# Allegro board PP001738.01.brd
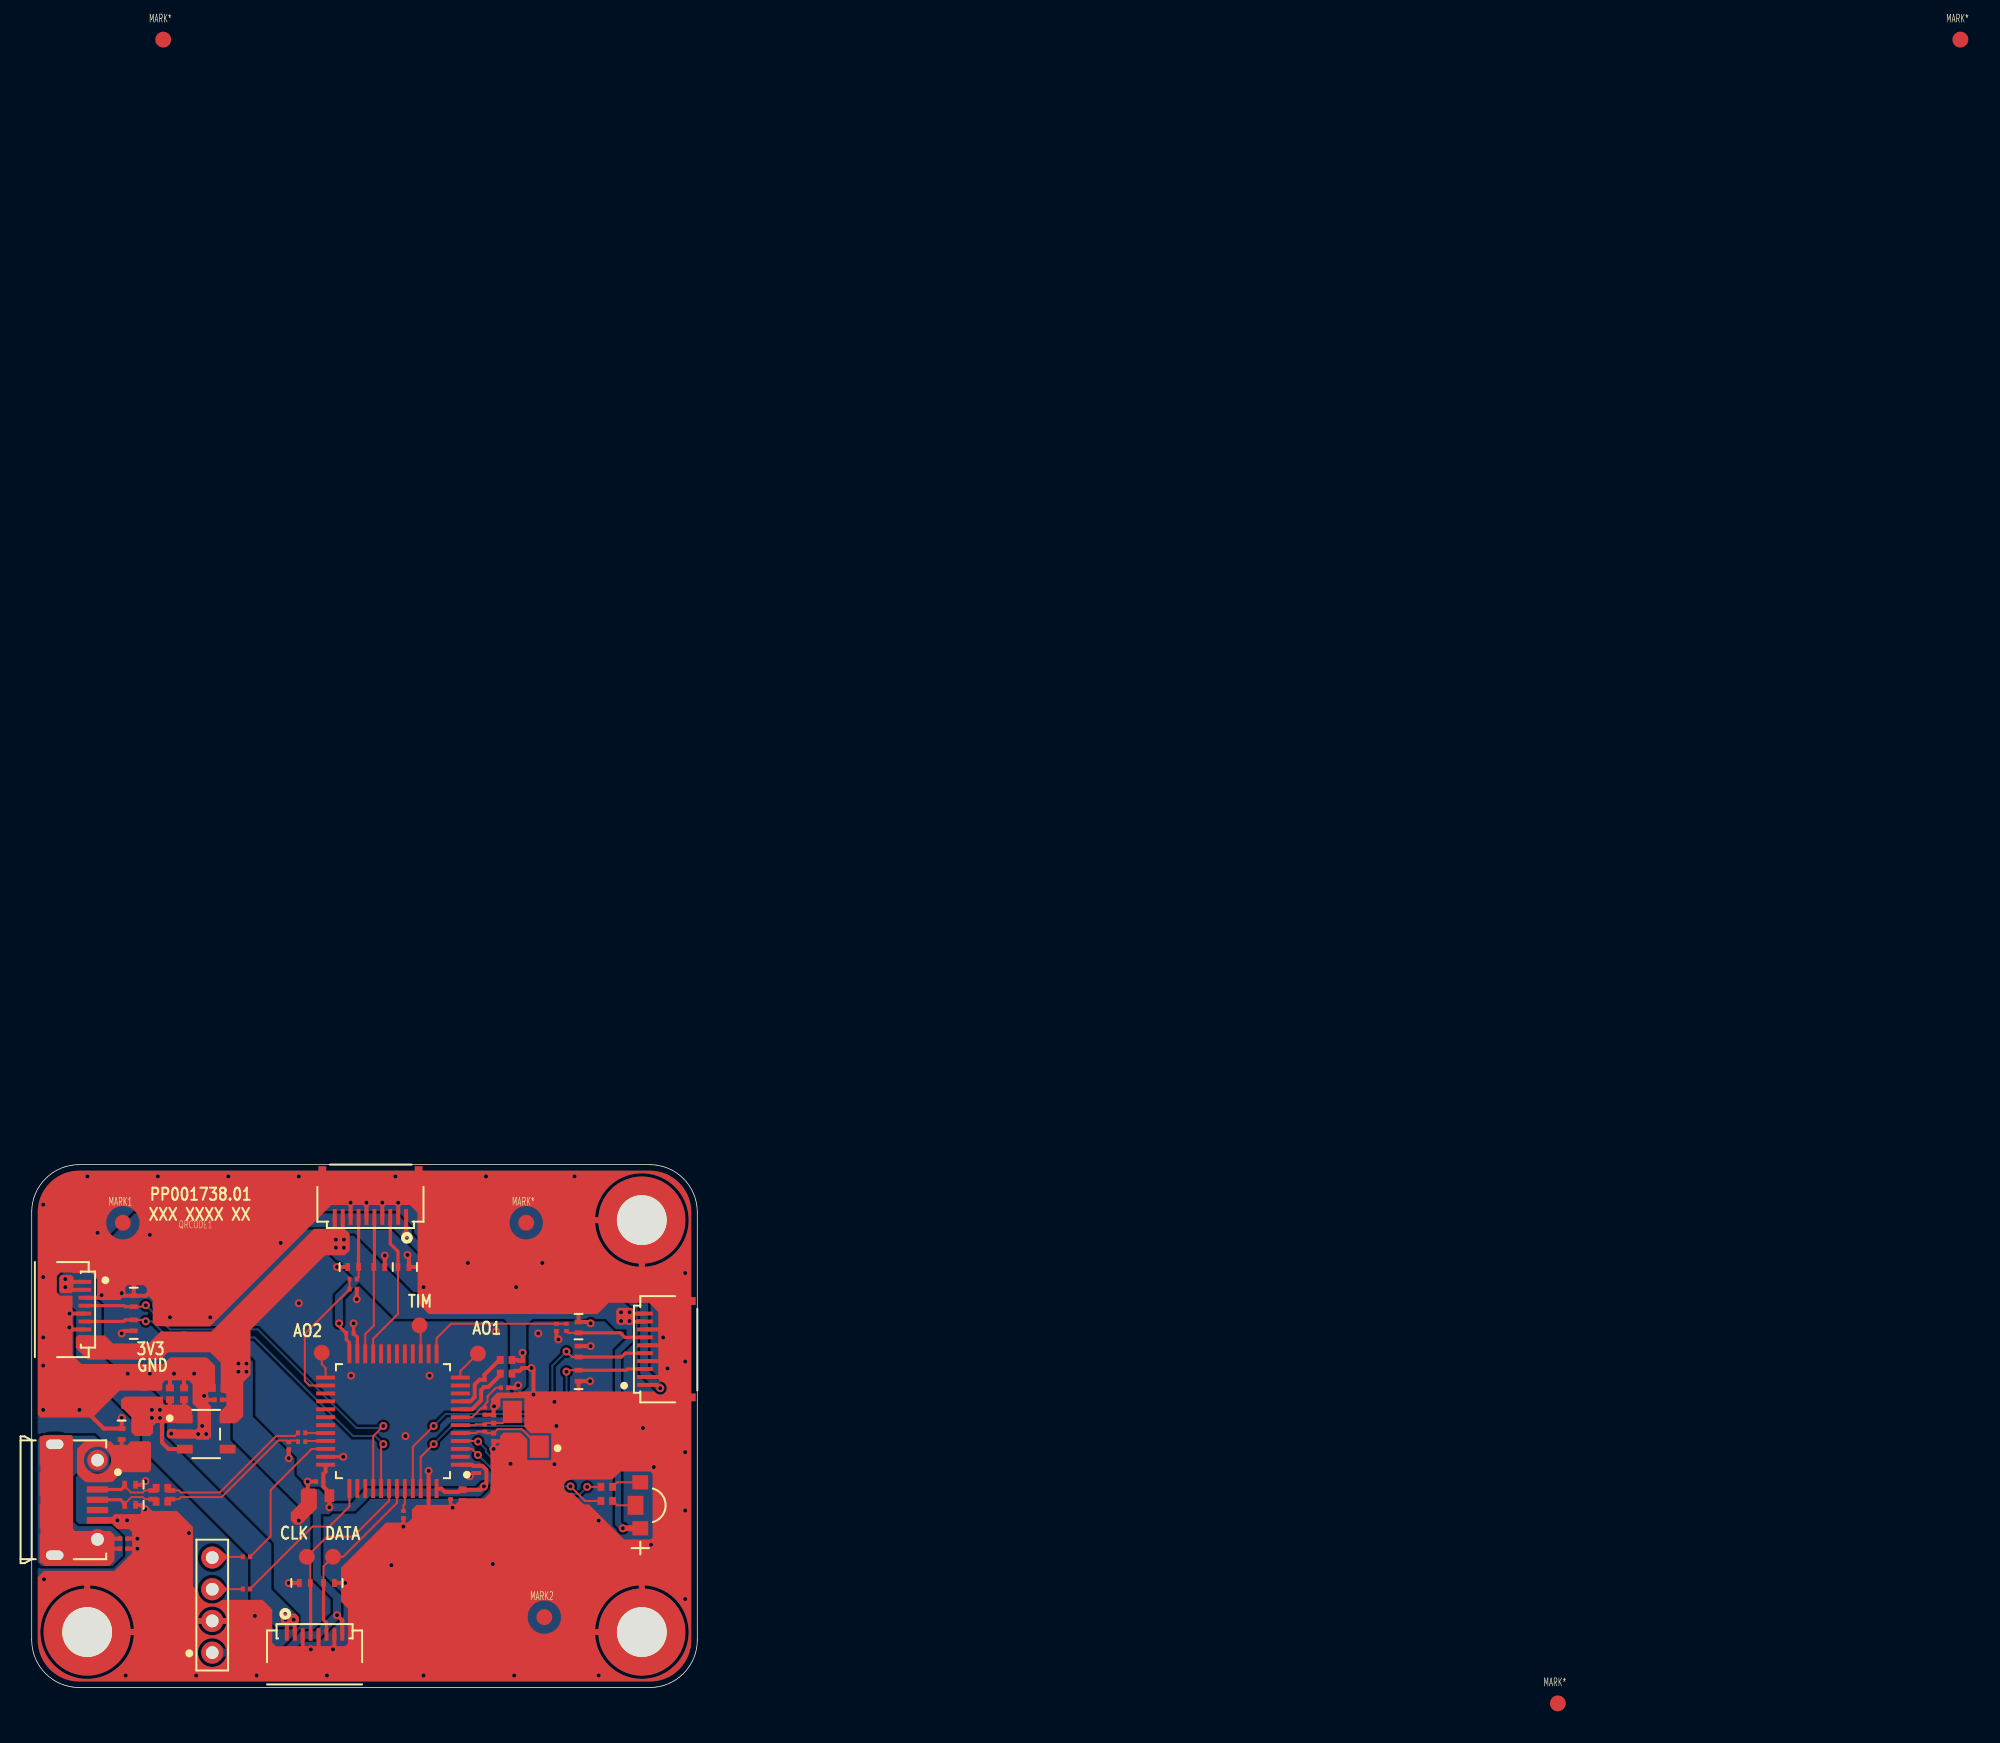
[diagram p0: board, top side]
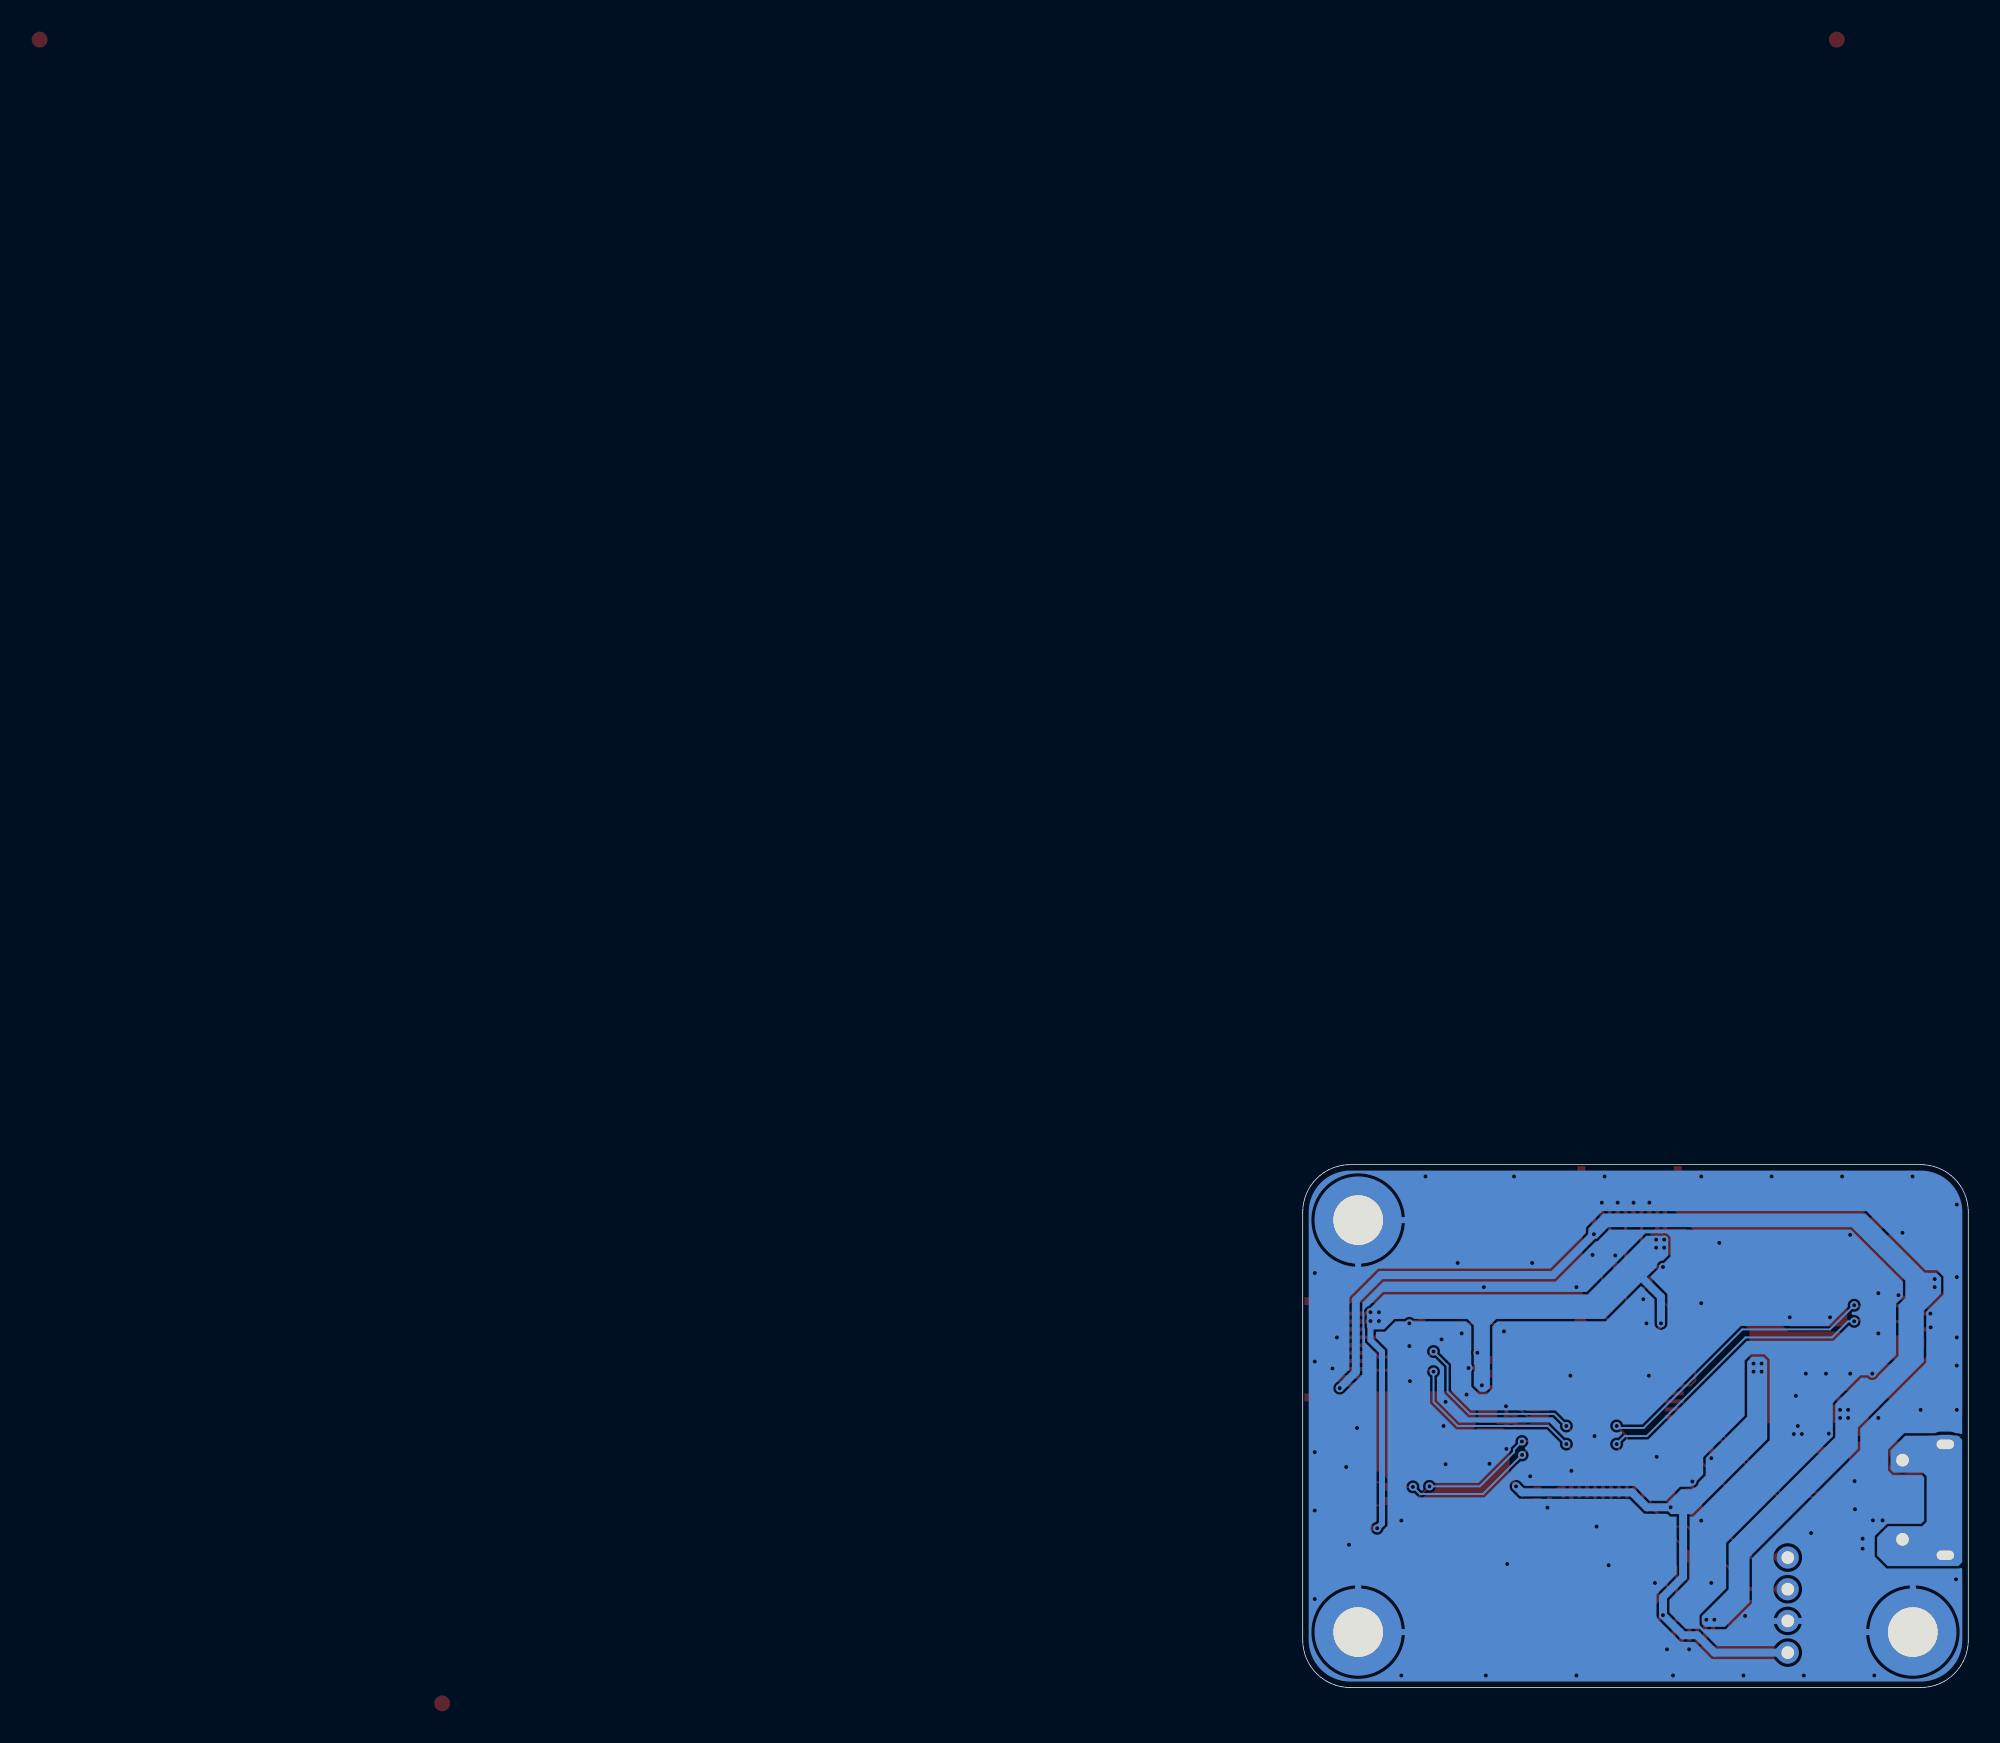
[diagram p1: board, bottom side, seen from below]

Outline 42 x 33 mm; copper layers: TOP, ART02, ART03, BOTTOM. Coordinates in mm from the lower left corner of the outline.
Outline path: 0,30 0,3 arc(0.88,0.88) 3,0 39,0 arc(41.12,0.88) 42,3 42,30 arc(41.12,32.12) 39,33 3,33 arc(0.88,32.12) 0,30

## Design rules (mm)
net group ADC_CHANNEL1: nets ADC_CHANNEL1 N16779618
net group ADC_CHANNEL2: nets ADC_CHANNEL2 N16782230
net group AGND: nets AGND VCCA_3V3
net group LED_GREEN: nets LED_GREEN N16762233
net group LED_RED: nets LED_RED N16762237
net group N16738443: nets N16738443 N16738447
net group SWCLK: nets N16761440 SWCLK
net group SWDIO: nets N16761444 SWDIO
net group PWR: nets GND VCC_3V3 VCC_5V
net group USB_DM: nets N16451924 N16739777 USB_DM
net group USB_DP: nets N16451878 N16739783 USB_DP

## Placement (name value [footprint] x y rotation side)
C1  18pF  [C0201]  29.15 15.79 90 top
C2  18pF  [C0201]  29.15 16.94 270 top
C3  100.0nF  [C0201_A]  18.17 13 0 top
C4  100.0nF  [C0201_A]  26.43 12.11 90 top
C5  100.0nF  [C0201_A]  28.21 13.76 90 top
C6  100.0nF  [C0201_A]  20.08 22.35 180 top
C7  100.0nF  [C0201_A]  28.59 17.45 90 top
C8  100.0nF  [C0201_A]  30.98 20.39 90 top
C9  100.0nF  [C0201_A]  28.56 19.2 90 top
C10  4.7uF  [C0603_B]  18.17 12.11 180 top
C11  1.0uF  [C0402_B]  27.19 12.11 270 top
C12  100nF  [C0402]  7.89 18.54 90 top
C13  1.0uF  [C0402_B]  9.61 18.54 90 top
C14  1.0nF  [C0201_A]  5.8 9.39 0 top
C15  2.2uF  [C0603_D]  6.06 18.54 90 top
C16  1.0uF  [C0402_B]  8.73 18.54 90 top
C17  100nF  [C0402]  7.07 18.54 90 top
C18  100.0nF  [C0201_A]  11.77 18.16 0 top
C19  1.0uF  [C0402_B]  11.77 18.92 180 top
C20  2.2uF  [C0603_D]  11.65 19.94 180 top
C21  33.0pF_NC  [C0201_A]  33.11 22.73 270 top
C22  33.0pF_NC  [C0201_A]  20.28 25.14 0 top
D1  BL-HGEUB34H-TRB  [LED_3-3X2-1P1_H]  38.4 11.5 270 top
D2  TPD1E10B06DP  [SOD882_2-0P65-1P02X0P62-0P5]  5.68 16 90 top
D3  PESD5V0F1BL  [SOD882_2-0P65-1P02X0P62-0P5]  6.21 12.8 0 top
D4  PESD5V0F1BL  [SOD882_2-0P65-1P02X0P62-0P5]  6.21 11.53 0 top
D5  PESD5V0F1BL  [SOD882_2-0P65-1P02X0P62-0P5]  18.76 6.6 0 top
D6  PESD5V0F1BL  [SOD882_2-0P65-1P02X0P62-0P5]  17.23 6.6 180 top
D7  PESD5V0F1BL  [SOD882_2-0P65-1P02X0P62-0P5]  6.44 22.86 270 top
D8  PESD5V0F1BL  [SOD882_2-0P65-1P02X0P62-0P5]  6.44 24.38 90 top
D9  PESD5V0F1BL  [SOD882_2-0P65-1P02X0P62-0P5]  34.51 22.73 90 top
D10  PESD5V0F1BL  [SOD882_2-0P65-1P02X0P62-0P5]  34.51 21.21 90 top
D11  PESD5V0F1BL  [SOD882_2-0P65-1P02X0P62-0P5]  34.51 19.68 270 top
D12  PESD5V0F1BL  [SOD882_2-0P65-1P02X0P62-0P5]  20.28 26.54 180 top
D13  PESD5V0F1BL  [SOD882_2-0P65-1P02X0P62-0P5]  21.93 26.54 0 top
D14  PESD5V0F1BL  [SOD882_2-0P65-1P02X0P62-0P5]  23.46 26.54 0 top
FB1  BLM15BB121SN1  [L0402_B]  29.93 20.67 180 top
FB2  BLM15BB121SN1  [L0402_B]  29.93 19.81 180 top
HOLE1  Hole  [HOLE_PC5P5DC3P1]  38.5 29.5 0 top
HOLE2  Hole  [HOLE_PC5P5DC3P1]  38.5 3.5 0 top
HOLE3  Hole  [HOLE_PC5P5DC3P1]  3.5 3.5 0 top
J1  SIP4-2P54MM  [DCON_4-2-8X2-6_M]  11.39 5.2 90 top
J2  105017-0001  [USB_5-0P65-7P5X4P7-2P9]  2.35 11.85 270 top
J3  OK-F501-08325  [OK-F501_8-0P5-6X3P8-1P85]  17.85 1.9 0 top
J4  OK-F501-08325  [OK-F501_8-0P5-6X3P8-1P85]  1.9 23.85 270 top
J5  503480-1000  [CON_10-0P5-6P7X3P6-1]  40.2 21.35 90 top
J6  503480-1000  [CON_10-0P5-6P7X3P6-1]  21.37 31.2 180 top
L1  INDUCTOR  [L0603]  7.07 15.62 90 top
L2  EXC24CE900U_NC  [DL0504]  8.22 12.16 0 top
MARK1  T POINT R  [MARK_C1]  5.75 29.33 0 top
MARK2  T POINT R  [MARK_C1]  32.35 4.44 0 top
MARK*  -  [unnamed#2]  121.7 104 0 top
MARK*#2  -  [unnamed#2]  31.2 29.33 0 top
MARK*#3  -  [unnamed#2]  8.3 104 0 top
MARK*#4  -  [unnamed#2]  96.3 -1 0 top
NOREF  -  []  38.24 19.55 90 top
NOREF#2  -  []  23.12 29.7 0 top
NOREF#3  -  []  18.55 14.06 90 top
NOREF#4  -  []  23.62 29.7 0 top
NOREF#5  -  []  17.9 19.81 0 top
NOREF#6  -  []  10.39 9.33 0 top
NOREF#7  -  []  10.39 1.08 90 top
NOREF#8  -  []  7.07 14.92 90 top
NOREF#9  -  []  18.02 32.45 0 top
NOREF#10  -  []  38.7 19.1 0 top
NOREF#11  -  []  41.35 18.31 90 top
NOREF#12  -  []  11.39 2.2 90 top
NOREF#13  -  []  36.85 22.6 0 top
NOREF#14  -  []  19.41 29.4 90 top
NOREF#15  -  []  38.7 19.1 90 top
NOREF#16  -  []  19.2 13.21 90 top
NOREF#17  -  []  18.33 32.35 0 top
QRCODE1  T POINT R  [QRCODE_3P5X3P5]  10.5 26.16 0 top
R1  100R  [R0201]  13.55 6.22 0 top
R2  100R  [R0201]  13.55 8.25 0 top
R3  22.0R  [R0201]  17.03 16.07 0 top
R4  22.0R  [R0201]  17.03 15.52 0 top
R5  1.5KR  [R0201]  16.22 15.26 90 top
R6  510R  [R0402]  36.28 12.66 180 top
R7  510R  [R0402]  36.28 11.78 180 top
R8  1M  [R0201]  28.59 16.38 270 top
R9  10.0KR  [R0201]  29.83 18.92 0 top
R10  10.0KR  [R0201]  23.46 10.92 270 top
R11  0.0R  [R0402]  8.22 12.59 0 top
R12  0.0R  [R0402]  8.22 11.73 0 top
R13  1M  [R0201]  5.8 8.76 180 top
R14  100R  [R0201]  33.74 22.73 90 top
R15  100R  [R0201]  20.28 25.78 180 top
TP_3V3_1  T POINT R  [TP_C1]  9.61 21.97 0 top
TP_ADCOUT1  T POINT R  [TP_C1]  28.16 21.08 180 top
TP_ADCOUT2  T POINT R  [TP_C1]  18.3 21.13 180 top
TP_CLK1  T POINT R  [TP_C1]  17.36 8.25 0 top
TP_DATA1  T POINT R  [TP_C1]  19.01 8.25 0 top
TP_GND1  T POINT R  [TP_C1]  9.61 20.32 0 top
TP_TIM1  T POINT R  [TP_C1]  24.47 22.86 0 top
U1  STM32F303CBT6  [QFP_48-0P5-7P2X7P2-1P6]  22.8 16.81 90 top
U2  LP5907MFX-3.3/NOPB  [SOT-23_5-0P95-3P05X1P75-1P45]  11.01 16 0 top
X1  12.0MHz  [X322508]  31.18 16.3 90 top

## Library data of the parts
C1 C2 = CAP NP: signal model: DEFAULT_CAPACITOR_18.000000pF_2_1
C3-C9 C18 = C: signal model: DEFAULT_CAPACITOR_100000pF_2_1
C10 = CAP NP: signal model: DEFAULT_CAPACITOR_4.7e+06pF_2_1
C11 C13 C16 C19 = CAP NP: signal model: DEFAULT_CAPACITOR_1e+06pF_2_1
C12 C17 = CAP NP: signal model: DEFAULT_CAPACITOR_100000pF_2_1
C14 = C: signal model: DEFAULT_CAPACITOR_1000pF_2_1
C15 C20 = CAP NP: signal model: DEFAULT_CAPACITOR_2.2e+06pF_2_1
C21 C22 = C
D1 = LED-3PIN-A
D2 = TPD1E10B06DP
D3-D14 = PESD5V0F1BL
FB1 FB2 = FERRITE_BEAD
HOLE1-HOLE3 = Hole
J1 = SIP4-2P54MM
J2 = 105017-0001
J3 J4 = 1X8-CON-2
J5 J6 = 503480-1000
L1 = INDUCTOR
L2 = DLP11SA900HL2
MARK1 MARK2 QRCODE1 TP_3V3_1 TP_ADCOUT1 TP_ADCOUT2 TP_CLK1 TP_DATA1 TP_GND1 TP_TIM1 = T POINT R
R1 R2 R14 R15 = RES: signal model: DEFAULT_RESISTOR_100.000000OHM_2_1
R3 R4 = R: signal model: DEFAULT_RESISTOR_22.000000OHM_2_1
R5 R9 R10 = R
R6 R7 = RES: signal model: DEFAULT_RESISTOR_510.000000OHM_2_1
R8 R11-R13 = RES: signal model: DEFAULT_RESISTOR_0.001OHM_2_1
U1 = STM32F303CBT6
U2 = LP5907MFX-3_1.3/NOPB
X1 = OSC-4PIN

## Footprints (pads in the part's own frame, mm; a bottom-side part is the same pattern mirrored in y, then rotated)
C0201
  rect 0.305x0.33 smd: 1(-0.254,0) 2(0.254,0)
C0201_A
  rect 0.254x0.305 smd: 1(-0.229,0) 2(0.229,0)
C0402
  rect 0.5x0.5 smd: 1(-0.45,0) 2(0.45,0)
C0402_B
  rect 0.432x0.508 smd: 1(-0.369,0) 2(0.369,0)
C0603_B
  rect 0.61x0.813 smd: 1(-0.61,0) 2(0.61,0)
C0603_D
  rect 0.635x0.813 smd: 1(-0.623,0) 2(0.623,0)
CON_10-0P5-6P7X3P6-1
  rect 0.25x1 smd: 1(-2.25,1.5) 2(-1.75,1.5) 3(-1.25,1.5) 4(-0.75,1.5) 5(-0.25,1.5) 6(0.25,1.5) 7(0.75,1.5) 8(1.25,1.5) 9(1.75,1.5) 10(2.25,1.5)
  rect 0.5x1.1 smd: 11(-3.04,-1.15) 12(3.04,-1.15)
DCON_4-2-8X2-6_M
  round 1.4 hole 0.8: 1(-3,0) 2(-1,0) 3(1,0) 4(3,0)
DL0504
  rect 0.6x0.3 smd: 1(-0.55,-0.275) 2(0.55,-0.275) 3(0.55,0.275) 4(-0.55,0.275)
HOLE_PC5P5DC3P1
  round 5.5 hole 3.1: 1(0,0)
L0402_B
  rect 0.432x0.508 smd: 1(-0.369,0) 2(0.369,0)
L0603
  rect 0.8x0.8 smd: 1(-0.7,0) 2(0.7,0)
LED_3-3X2-1P1_H
  rect 0.9x1 smd: A1(1.45,0) C2(-1.45,0)
  rect 1.2x1 smd: C1(0,-0.3)
MARK_C1
  round 1 smd: 1(0,0)
OK-F501_8-0P5-6X3P8-1P85
  rect 0.25x0.8 smd: 1(-1.75,1.45) 2(-1.25,1.45) 3(-0.75,1.45) 4(-0.25,1.45) 5(0.25,1.45) 6(0.75,1.45) 7(1.25,1.45) 8(1.75,1.45)
  rect 0.4x0.8 smd: 9(-2.75,-1.05) 10(2.75,-1.05)
QFP_48-0P5-7P2X7P2-1P6
  rect 0.25x1.2 smd: 1(-2.75,-4.25) 2(-2.25,-4.25) 3(-1.75,-4.25) 4(-1.25,-4.25) 5(-0.75,-4.25) 6(-0.25,-4.25) 7(0.25,-4.25) 8(0.75,-4.25) 9(1.25,-4.25) 10(1.75,-4.25) 11(2.25,-4.25) 12(2.75,-4.25) 25(2.75,4.25) 26(2.25,4.25) 27(1.75,4.25) 28(1.25,4.25) 29(0.75,4.25) 30(0.25,4.25) 31(-0.25,4.25) 32(-0.75,4.25) 33(-1.25,4.25) 34(-1.75,4.25) 35(-2.25,4.25) 36(-2.75,4.25)
  rect 1.2x0.25 smd: 13(4.25,-2.75) 14(4.25,-2.25) 15(4.25,-1.75) 16(4.25,-1.25) 17(4.25,-0.75) 18(4.25,-0.25) 19(4.25,0.25) 20(4.25,0.75) 21(4.25,1.25) 22(4.25,1.75) 23(4.25,2.25) 24(4.25,2.75) 37(-4.25,2.75) 38(-4.25,2.25) 39(-4.25,1.75) 40(-4.25,1.25) 41(-4.25,0.75) 42(-4.25,0.25) 43(-4.25,-0.25) 44(-4.25,-0.75) 45(-4.25,-1.25) 46(-4.25,-1.75) 47(-4.25,-2.25) 48(-4.25,-2.75)
QRCODE_3P5X3P5
  round 0.076 smd: 1(0,0)
R0201
  rect 0.254x0.305 smd: 1(-0.229,0) 2(0.229,0)
R0402
  rect 0.432x0.508 smd: 1(-0.369,0) 2(0.369,0)
SOD882_2-0P65-1P02X0P62-0P5
  rect 0.3x0.5 smd: A(-0.345,0) C(0.345,0)
SOT-23_5-0P95-3P05X1P75-1P45
  rect 1x0.55 smd: 1(-1.35,0.95) 2(-1.35,0) 3(-1.35,-0.95) 4(1.35,-0.95) 5(1.35,0.95)
TP_C1
  round 1 smd: 1(0,0)
unnamed#2
  round 1 smd: 1(0,0)
USB_5-0P65-7P5X4P7-2P9
  rect 0.4x1.35 smd: 1(-1.3,1.8) 2(-0.65,1.8) 3(0,1.8) 4(0.65,1.8) 5(1.3,1.8)
  round 1.3 hole 0.8: 6(-2.5,1.8) 7(2.5,1.8)
  rect 1.8x1.9 hole 0.6x1.1: 8(3.5,-0.9) 11(-3.5,-0.9)
  rect 1.5x1.9 smd: 9(1,-0.9) 10(-1,-0.9)
X322508
  rect 1.4x1.2 smd: 1(-1.1,-0.85) 2(1.1,-0.85) 3(1.1,0.85) 4(-1.1,0.85)

## Nets
AGND: C9.1 FB2.2 U1.8(VSSA/VREF-)
GND: C1.1 C2.1 C3.1 C4.1 C5.1 C6.1 C7.1 C8.1 C10.2 C11.2 C12.2 C13.2 C14.2 C15.2 C16.2 C17.2 C18.1 C19.2 C20.2 C21.2 C22.2 D2.C(2) D3.C D4.C D5.C D6.C D7.C D8.C D9.C D10.C D11.C D12.C D13.C D14.C FB2.1 HOLE1.1 HOLE2.1 HOLE3.1 J1.2 J2.5(GND) J3.3 J3.5 J3.7 J3.9 J3.10 J4.3 J4.5 J4.7 J4.9 J4.10 J5.2 J5.4 J5.6 J5.8 J5.11 J5.12 J6.2 J6.4 J6.6 J6.8 J6.11 J6.12 QRCODE1.1(TP) R10.2 R13.1 TP_GND1.1(TP) U1.23(VSS_2) U1.35(VSS_3) U1.47(VSS_1) U2.2(GND) X1.2 X1.4
VCC_3V3: C3.2 C4.2 C5.2 C6.2 C8.2 C10.1 C11.1 C18.2 C19.1 C20.1 D1.A1(ANODE) FB1.1 J1.1 J3.8 J4.8 J5.9 J5.10 J6.9 J6.10 R5.1 R9.2 TP_3V3_1.1(TP) U1.1(VBAT) U1.24(VDD_2) U1.36(VDD_3) U1.48(VDD_1) U2.5(OUT)
VCC_5V: C12.1 C13.1 C15.1 C16.1 C17.1 J3.1 J3.2 J4.1 J4.2 J5.1 J6.1 L1.2 U2.1(IN) U2.3(EN)
VCCA_3V3: C9.2 FB1.2 U1.9(VDDA/VREF+)
ADC_CHANNEL1: C21.1 R14.2 U1.13(PA3)
ADC_CHANNEL2: C22.1 R15.2 U1.26(PB13)
LED_GREEN: R6.2 U1.3(PC14-OSC32_IN)
LED_RED: R7.2 U1.4(PC15-OSC32_OUT)
RX1_CLK: D10.A J5.5 U1.45(PB8)
RX1_DATA: D11.A J5.3 U1.46(PB9)
RX2_CLK: D13.A J6.5 U1.22(PB11)
RX2_DATA: D14.A J6.3 U1.21(PB10)
SWCLK: R1.2 U1.37(PA14)
SWDIO: R2.2 U1.34(PA13)
TX1_CLK: D6.A J3.4 TP_CLK1.1(TP) U1.42(PB6)
TX1_DATA: D5.A J3.6 TP_DATA1.1(TP) U1.43(PB7)
TX2_CLK: D8.A J4.4 U1.40(PB4)
TX2_DATA: D7.A J4.6 U1.41(PB5)
USB_DM: L2.3 R3.1 R11.2
USB_DP: L2.2 R4.1 R5.2 R12.2
N16451878: D4.A J2.3(DP) L2.1 R12.1
N16451924: D3.A J2.2(DM) L2.4 R11.1
N16452106: D2.A(1) J2.1(VBUS) L1.1
N16452110: C14.1 J2.6(SHELL1) J2.7(SHELL2) J2.8(SHELL3) J2.9(SHELL4) J2.10(SHELL5) J2.11(SHELL6) R13.2
N16738443: C2.2 R8.1 U1.6(PF1-OSC_OUT) X1.3
N16738447: C1.2 R8.2 U1.5(PF0-OSC_IN) X1.1
N16739461: C7.2 R9.1 U1.7(NRST)
N16739517: R10.1 U1.44(BOOT0)
N16739777: R3.2 U1.32(PA11)
N16739783: R4.2 U1.33(PA12)
N16761440: J1.3 R1.1
N16761444: J1.4 R2.1
N16762233: D1.C2(CATHODE2) R6.1
N16762237: D1.C1(CATHODE1) R7.1
N16779618: D9.A J5.7 R14.1
N16782230: D12.A J6.7 R15.1
N16787058: TP_ADCOUT2.1(TP) U1.25(PB12)
N16787082: TP_ADCOUT1.1(TP) U1.12(PA2)
N16795879: TP_TIM1.1(TP) U1.15(PA5)

Pads without a net: J2 4; MARK1 1; MARK2 1; MARK* 1; MARK*#2 1; MARK*#3 1; MARK*#4 1; U1 2 10 11 14 16 17 18 19 20 27 28 29 30 31 38 39; U2 4

## Via types
v1: diameter 0.508, hole 0.254, TOP to BOTTOM, 146 vias

## Routing (per net, layer and track width the routed paths; a pad name or vN(x,y) marks a point on that pad's centre or on a via; arc(x,y) is an arc through that point)
AGND: length 3.9
  TOP w0.254: U1.8 27.79,17.56 28.36,18.13 28.36,18.77 C9.1 28.82,18.97 29.57,19.72 FB2.2
GND: length 151.7
  TOP w0.203: U1.35 v1(19.66,14.56) ; v1(26.56,11.35) 26.43,11.48 C4.1 ; v1(20.31,22.98) C6.1 20.55,22.11 U1.23
  TOP w0.254: J3.5 18.1,2.31 ; C14.2 v1(6.67,9.39) ; R13.1 v1(6.67,8.76) ; D12.C v1(19.27,26.54) ; 39.82,22.6 39.81,22.6 J5.8 ; FB2.1 30.48,19.99 30.8,19.99 C8.1 v1(31.53,20.16) 31.66,20.04 v1(31.66,18.49) ; X1.4 29.99,15.54 C1.1 v1(29.15,15.06) ; v1(35.27,22.98) 35.18,23.07 D9.C 34.51,23.9 34.46,23.95 ; J5.2 39.81,19.6 39.82,19.6 ; v1(33.24,21.97) 33.11,22.09 C21.2 ; 39.92,21.56 39.88,21.6 J5.6 ; J4.3 4.25,24.6 v1(4.41,24.76) ; v1(7.15,11.25) 6.87,11.53 D4.C ; 25.03,11.17 25.05,11.19 U1.47 v1(25.05,13.68) ; D7.C 5.84,22.51 v1(5.68,22.35) ; C10.2 17.41,12.26 v1(17.41,13) C3.1 ; v1(23.71,27.3) 23.8,27.21 D14.C 25.06,26.54 25.08,26.56 ; C13.2 9.61,19.58 ; J3.7 19.1,2.5 v1(19.01,2.41) ; J4.5 v1(2.39,23.6) ; v1(5.68,17.01) D2.C 4.55,16.34 3.59,17.29 ; v1(7.18,13.03) 6.95,12.8 D3.C ; v1(35.23,19.34) D11.C 34.51,18.26 ; C7.1 29.12,17.22 C2.1 29.15,17.73 v1(29.17,17.75) ; J4.7 2.5,22.6 v1(2.38,22.73) ; D8.C 5.84,24.73 v1(5.68,24.89) ; D8.C 7.22,24.73 7.43,24.94 ; D8.C 6.44,25.73 6.41,25.75 ; C22.2 v1(20.51,24.51) ; C18.1 11.14,18.16 v1(10.88,18.41) ; 39.81,20.6 J5.4 ; R10.2 v1(23.46,10.16) ; 17.08,2.28 17.1,2.3 J3.3 ; J6.8 v1(20.12,30.6) ; v1(19.77,6.6) D5.C ; J6.6 v1(21.12,30.6) ; v1(27.65,13.33) 27.85,13.53 C5.1 ; J6.2 v1(23.12,30.6) ; D13.C v1(22.28,27.27) ; D10.C v1(35.27,21.55) ; C16.2 8.73,19.55 v1(8.98,19.81) ; v1(16.22,6.6) D6.C ; J6.4 v1(22.12,30.6)
  TOP w0.381: 35.5,3.5 HOLE2.1 38.5,6.5 ; 35.5,29.5 HOLE1.1 38.5,26.5 ; 6.5,3.5 HOLE3.1 3.5,6.5 ; 10.44,4.2 J1.2 12.35,4.2
  ART02 w0.381: 3.5,1.25 HOLE3.1 ; HOLE3.1 3.5,5.75 ; HOLE3.1 1.25,3.5 ; HOLE3.1 5.75,3.5 ; HOLE1.1 40.75,29.5 ; HOLE1.1 38.5,27.25 ; HOLE1.1 38.5,31.75 ; HOLE1.1 36.25,29.5 ; J1.2 12.15,4.2 ; J1.2 11.39,4.96 ; J1.2 10.64,4.2 ; J1.2 11.39,3.45 ; HOLE2.1 40.75,3.5 ; HOLE2.1 38.5,1.25 ; HOLE2.1 38.5,5.75 ; HOLE2.1 36.25,3.5
  ART03 w0.381: HOLE1.1 38.5,31.75 ; HOLE1.1 40.75,29.5 ; HOLE1.1 38.5,27.25 ; HOLE1.1 36.25,29.5 ; HOLE3.1 3.5,5.75 ; HOLE3.1 3.5,1.25 ; HOLE3.1 1.25,3.5 ; HOLE3.1 5.75,3.5 ; HOLE2.1 40.75,3.5 ; HOLE2.1 38.5,5.75 ; HOLE2.1 36.25,3.5 ; HOLE2.1 38.5,1.25 ; 10.64,4.2 J1.2 ; J1.2 12.15,4.2 ; J1.2 11.39,4.96 ; J1.2 11.39,3.45
  BOTTOM w0.381: 38.5,26.5 HOLE1.1 35.5,29.5 ; 35.5,3.5 HOLE2.1 38.5,6.5 ; 12.35,4.2 J1.2 10.44,4.2 ; 3.5,6.5 HOLE3.1 6.5,3.5
  vias: v1(0.72,30.48) v1(0.72,25.9) v1(0.72,22.09) v1(0.72,20.32) v1(0.72,17.52) v1(0.78,6.83) v1(3.01,17.52) v1(3.52,32.25) v1(4.15,28.7) v1(5.41,10.55) v1(6.02,10.55) v1(5.93,0.76) v1(6.06,19.81) v1(7.46,28.57) v1(7.46,19.81) v1(7.96,32.25) v1(8.73,23.36) v1(8.8,16.02) v1(9.92,9.75) v1(10.25,19.81) v1(10.38,0.76) v1(10.5,16) v1(10.76,16.51) v1(11.01,16) v1(11.27,23.36) v1(12.41,32.25) v1(14.09,4.52) v1(14.19,0.76) v1(15.71,28.06) v1(16.85,32.25) v1(16.85,24.25) v1(16.85,10.54) v1(17.62,2.41) v1(18.63,0.76) v1(20.16,19.68) v1(22.7,7.72) v1(22.95,32.25) v1(23.58,15.87) v1(24.73,25.27) v1(24.73,0.76) v1(25.11,19.68) v1(27.52,26.79) v1(28.66,32.25) v1(29.1,7.79) v1(29.3,22.48) v1(30.21,14.12) v1(30.44,0.76) v1(30.57,25.27) v1(31.97,22.35) v1(32.22,26.79) v1(32.98,18.03) v1(32.98,14.09) v1(33.11,16.51) v1(34.25,32.25) v1(35.78,10.54) v1(35.78,0.76) v1(38.57,16.38) v1(39.08,9.01) v1(39.26,13.92) v1(39.84,22.09) v1(40.12,20.14) v1(41.24,26.16) v1(41.24,20.57) v1(41.24,14.86) v1(41.24,11.17) v1(41.24,5.58)
VCC_3V3: length 63.9
  TOP w0.203: v1(19.39,22.98) 19.39,22.81 C6.2 19.85,21.97 20.05,21.77 U1.24
  TOP w0.254: v1(37.72,23.69) 37.81,23.6 J5.10 ; C18.2 12.43,18.16 ; 19.62,28.75 J6.9 ; v1(30.7,19.07) 30.54,18.92 R9.2 ; U1.48 25.85,12.56 26.07,12.34 C4.2 26.91,12.34 27.05,12.48 C11.1 28.32,12.48 v1(28.54,12.7) 28.69,12.85 28.69,13.74 28.44,13.99 C5.2 27.85,13.99 27.78,14.06 U1.1 ; J3.8 19.6,4.23 v1(19.27,4.57) ; U1.36 18.55,13.63 18.4,13.48 C3.2 18.4,12.7 18.78,12.31 C10.1 v1(18.78,11.37) ; v1(37.72,23.13) 37.75,23.1 J5.9 ; FB1.1 30.67,20.67 30.72,20.62 C8.2 v1(30.98,21.13) ; J6.10 19.12,28.73 ; v1(16.22,14.47) R5.1
  TOP w0.381: D1.A1 v1(37.3,10.05)
  BOTTOM w0.381: v1(37.3,10.05) 37,10.35 37,21.2 37.72,21.93 v1(37.72,23.13)
  BOTTOM w0.508: 20.66,25.93 19.39,24.66 v1(19.39,22.98) ; v1(18.78,11.37) 20.28,11.37 21.22,12.32 28.16,12.32 v1(28.54,12.7) ; J1.1 16.01,2.2 17.11,3.3 18,3.3 v1(19.27,4.57) 19.27,5.71 18,6.98 18,11.3
  vias: v1(13.04,20.44) v1(13.04,19.94) v1(13.55,20.44) v1(13.55,19.94) v1(19.19,28.27) v1(19.19,27.76) v1(19.7,28.27) v1(19.7,27.76) v1(37.19,23.69) v1(37.19,23.13)
VCC_5V: length 32.7
  TOP w0.254: v1(8.09,17.01) 8.22,16.89 8.22,15.46 8.63,15.05 U2.3 ; J4.1 2.45,25.6 ; J3.2 16.6,4.25 ; J3.1 16.1,4.28 ; J4.2 2.42,25.1 ; J5.1 39.46,19.1 v1(39.66,18.89) ; J6.1 v1(23.62,28.61) ; C13.1 9.61,17.65 ; C16.1 8.73,17.78
  BOTTOM w0.508: v1(39.66,18.89) 38.65,19.91 38.65,24.46 37.07,26.03 26.2,26.03 v1(23.62,28.61)
  vias: v1(2.12,25.78) v1(2.12,25.27) v1(7.58,17.52) v1(7.58,17.01) v1(8.09,17.52) v1(16.02,4.28) v1(16.53,4.28)
VCCA_3V3: length 4.2
  TOP w0.254: U1.9 27.68,18.06 27.95,18.33 27.95,19.12 28.26,19.43 C9.2 28.56,19.73 29.5,20.67 FB1.2
ADC_CHANNEL1: length 9.6
  TOP w0.127: R14.2 C21.1 26.46,22.96 25.55,22.04 U1.13
ADC_CHANNEL2: length 9
  TOP w0.127: U1.26 17.52,19.06 17.23,19.35 17.23,22.32 C22.1 R15.2
LED_GREEN: length 10.2
  TOP w0.127: v1(28.16,14.68) 27.77,15.06 U1.3 ; R6.2 v1(35.05,12.66)
  BOTTOM w0.127: v1(35.05,12.66) 34.6,12.21 30.62,12.21 v1(28.16,14.68)
LED_RED: length 10.5
  TOP w0.127: R7.2 34.92,11.78 v1(34,12.7) ; U1.4 28.13,15.56 v1(28.17,15.53)
  BOTTOM w0.127: v1(28.17,15.53) 28.66,15.03 28.66,14.86 30.82,12.7 v1(34,12.7)
RX1_CLK: length 21
  TOP w0.127: v1(33.74,21.21) 34.09,20.86 D10.A ; U1.45 24.05,15.19 v1(25.36,16.51)
  TOP w0.203: J5.5 37.45,21.1 37.21,20.86 D10.A
  BOTTOM w0.127: v1(25.36,16.51) 26.12,17.27 31.46,17.27 32.86,18.67 32.86,20.32 v1(33.74,21.21)
RX1_DATA: length 19.6
  TOP w0.127: v1(33.74,19.94) 33.84,20.03 D11.A ; v1(25.36,15.36) 24.55,14.55 U1.46
  TOP w0.203: J5.3 37.59,20.1 37.52,20.03 D11.A
  BOTTOM w0.127: v1(25.36,15.36) 26.51,16.51 32.22,16.51 33.74,18.03 v1(33.74,19.94)
RX2_CLK: length 8.9
  TOP w0.127: U1.22 21.05,22.3 21.59,22.84 D13.A
  TOP w0.203: D13.A 21.62,26.58 J6.5
RX2_DATA: length 9.5
  TOP w0.127: D14.A 23.11,23.58 21.55,22.01 U1.21
  TOP w0.203: D14.A 23.11,27.52 22.62,28.01 J6.3
SWCLK: length 9.6
  TOP w0.127: R1.2 17.72,10.16 18.78,10.16 20.05,11.43 U1.37
SWDIO: length 9.3
  TOP w0.127: R2.2 15.08,9.55 15.08,12.47 17.67,15.06 U1.34
TX1_CLK: length 12.4
  TOP w0.127: D6.A 17.58,8.03 TP_CLK1.1 18.63,9.52 20.28,9.52 22.55,11.79 U1.42
  TOP w0.203: J3.4 17.6,6.58 D6.A
TX1_DATA: length 11.6
  TOP w0.127: U1.43 23.05,11.65 19.65,8.25 TP_DATA1.1 18.41,7.65 D5.A
  TOP w0.203: D5.A 18.41,4.28 18.6,4.09 J3.6
TX2_CLK: length 26.4
  TOP w0.127: D8.A 7.11,24.04 v1(7.2,24.13) ; U1.40 21.55,15.87 v1(22.19,16.51)
  TOP w0.203: D8.A 5.9,24.04 5.83,24.1 J4.4
  BOTTOM w0.127: v1(22.19,16.51) 22.06,16.38 20.49,16.38 14.26,22.6 8.73,22.6 v1(7.2,24.13)
TX2_DATA: length 25
  TOP w0.127: D7.A 7.11,23.2 v1(7.2,23.11) ; v1(22.19,15.36) 22.05,15.22 U1.41
  TOP w0.203: J4.6 5.79,23.1 5.9,23.2 D7.A
  BOTTOM w0.127: v1(7.2,23.11) 7.58,23.11 8.6,22.09 14.06,22.09 20.28,15.87 21.68,15.87 v1(22.19,15.36)
USB_DM: length 9.7
  TOP w0.122: L2.3 9.3,12.44 9.43,12.31 11.87,12.31 15.44,15.88 16.61,15.88 R3.1
USB_DP: length 9.7
  TOP w0.122: R4.1 16.73,15.59 16.32,15.59 R5.2 16.12,15.59 15.56,15.59 11.99,12.02 9.43,12.02 9.3,11.89 L2.2
N16451878: length 3.9
  TOP w0.122: D4.A 5.87,11.59 6.3,12.02 7.01,12.02 7.14,11.89 L2.1
  TOP w0.203: 5.87,11.59 5.87,11.59 5.61,11.85 J2.3
N16451924: length 3.9
  TOP w0.122: L2.4 7.14,12.44 7.01,12.31 6.27,12.31 5.87,12.71 D3.A
  TOP w0.203: J2.2 5.66,12.5 5.87,12.71 5.87,12.71
N16452106: length 0.5
  TOP w0.254: D2.A 5.68,15.11
N16452110: length 1.2
  TOP w0.254: C14.1 4.99,9.39 ; R13.2 4.94,8.76
N16738443: length 3.7
  TOP w0.127: X1.3 30.33,17.31 29.71,16.68 C2.2 28.66,16.68 R8.1 28,16.61 27.96,16.56 U1.6
N16738447: length 5.6
  TOP w0.127: U1.5 28.04,16.06 28.13,16.15 R8.2 28.69,16.05 C1.2 29.4,16.3 30.93,16.3 X1.1
N16739461: length 3.6
  TOP w0.127: R9.1 29.3,18.92 28.77,18.39 28.77,18.03 28.59,17.85 C7.2 28.54,17.62 28.36,17.62 27.8,17.06 U1.7
N16739517: length 1.5
  TOP w0.127: U1.44 23.55,11.59 23.46,11.5 R10.1
N16739777: length 1.3
  TOP w0.122: R3.2 17.27,16.06 U1.32
N16739783: length 1.3
  TOP w0.122: U1.33 17.31,15.56 R4.2
N16761440: length 1.9
  TOP w0.127: R1.1 13.31,6.2 J1.3
N16761444: length 2
  TOP w0.127: J1.4 11.44,8.25 R2.1
N16762233: length 1.9
  TOP w0.127: D1.C2 36.94,12.95 R6.1
N16762237: length 1.6
  TOP w0.127: D1.C1 36.93,11.5 R7.1
N16779618: length 5.1
  TOP w0.127: R14.1 33.86,22.38 D9.A
  TOP w0.203: D9.A 37.14,22.38 37.43,22.09 38.69,22.09 J5.7
N16782230: length 4
  TOP w0.127: D12.A 20.63,25.89 R15.1
  TOP w0.203: J6.7 20.62,26.54 D12.A
N16787058: length 1.7
  TOP w0.127: U1.25 18.55,20.16 18.3,20.41 TP_ADCOUT2.1
N16787082: length 2
  TOP w0.127: TP_ADCOUT1.1 27.05,19.97 U1.12
N16795879: length 1.8
  TOP w0.127: TP_TIM1.1 24.55,22.78 U1.15

## Copper pours and planes (outline as drawn; the poured copper is in the pictures)
GND on TOP (solid shape): 18,12.44 18,11.3 16.98,10.28 16.6,10.28 16.35,10.54 16.35,11.05 16.98,11.68 16.98,12.44 17.11,12.57 17.87,12.57
GND on TOP (solid shape): outline of 1104 points within 0.38,0.38 41.62,32.62
GND on BOTTOM (solid shape): outline of 1543 points within 0.38,0.38 41.62,32.62
GND on ART02 (solid shape): outline of 2268 points within 0.38,0.38 41.62,32.62
GND on ART03 (solid shape): outline of 2268 points within 0.38,0.38 41.62,32.62
VCC_3V3 on TOP (solid shape): 37.95,23.89 37.95,22.98 37.9,22.92 36.99,22.92 36.89,23.03 36.89,23.81 37.04,23.97 37.88,23.97
VCC_3V3 on TOP (solid shape): 20.07,28.63 20.07,27.59 19.75,27.28 18.5,27.28 13.81,22.58 13.81,19.73 13.35,19.27 13.35,17.12 12.94,16.71 11.95,16.71 11.88,16.79 11.88,17.4 12.28,17.8 12.28,18.49 12.18,18.59 12,18.59 11.93,18.67 11.93,20.49 11.27,21.15 8.6,21.15 8.14,20.7 3.52,20.7 2.78,21.43 2.78,22.09 2.91,22.22 4.61,22.22 5.12,21.71 7.38,21.71 8.14,22.48 11.34,22.48 17.82,28.95 19.75,28.95
VCC_3V3 on BOTTOM (solid shape): 13.96,20.57 13.96,17.09 16.57,14.47 16.57,13.38 17.01,12.95 17.01,12.93 17.12,12.71 17.34,12.6 17.36,12.6 17.44,12.52 18.12,12.52 19.17,11.48 19.17,11.35 18.76,10.94 17.41,10.94 12.69,15.67 12.69,20.65 12.92,20.87 13.65,20.87
VCC_3V3 on BOTTOM (solid shape): 24.02,24.81 36.87,24.81 37.95,23.73 37.95,22.74 37.81,22.6 36.87,22.6 36.21,23.26 35.56,23.26 35.27,23.39 34.97,23.26 31.61,23.26 31.2,22.86 31.2,20.4 31.13,20.16 31.2,19.93 31.2,19.05 30.82,18.67 30.44,18.67 30.19,18.92 30.19,22.86 29.78,23.26 22.95,23.26 19.67,26.54 19.67,26.56 19.55,26.83 19.29,26.95 19.27,26.95 18.94,27.28 18.94,28.34 19.1,28.51 20.32,28.51
VCC_5V on TOP (solid shape): 2.63,25.9 2.63,25.02 2.5,24.89 1.87,24.89 1.74,25.02 1.74,25.9 1.87,26.03 2.5,26.03
VCC_5V on TOP (solid shape): 8.29,17.93 8.37,17.85 9.87,17.85 10.12,17.6 10.12,16.68 7.84,16.68 7.66,16.51 7.66,16.07 7.46,15.87 6.52,15.87 6.29,16.1 6.29,17.06 5.65,17.7 5.65,18.13 5.88,18.36 8.29,18.36
VCC_5V on BOTTOM (solid shape): 23.98,28.96 23.98,28.48 23.81,28.32 23.46,28.32 22.72,29.05 7.35,29.05 3.98,25.68 3.98,24.58 4.41,24.15 4.41,20.93 5.68,19.65 5.69,19.64 6.01,19.4 6.38,19.55 6.74,19.55 8.4,17.9 8.4,15.79 15.13,9.06 15.13,6.19 16.8,4.52 16.8,4.01 16.63,3.83 15.36,3.83 13.81,5.38 13.81,8.23 6.97,15.06 6.97,16.4 2.81,20.57 2.81,23.77 1.72,24.86 1.72,25.88 2.02,26.18 2.76,26.18 6.49,29.92 23.03,29.92
N16452106 on TOP (solid shape): outline of 82 points within 2.86,12.98 7.53,15.54
N16452110 on TOP (solid shape): 2.6,15.82 2.6,10 2.73,9.88 4.97,9.88 5.22,9.62 5.22,8 4.89,7.67 0.83,7.67 0.55,7.95 0.55,15.74 0.74,15.93 2.49,15.93
N16452110 on BOTTOM (solid shape): 4.92,14.96 4.92,13.76 4.71,13.56 2.86,13.56 2.63,13.33 2.63,10.46 2.91,10.18 5.07,10.18 5.75,9.5 5.75,8.33 5.09,7.67 0.62,7.67 0.38,7.91 0.38,15.63 0.65,15.9 3.98,15.9
N16452110 on ART02 (solid shape): 4.92,14.96 4.92,13.76 4.71,13.56 2.86,13.56 2.63,13.33 2.63,10.46 2.91,10.18 5.07,10.18 5.75,9.5 5.75,8.33 5.09,7.67 0.62,7.67 0.38,7.91 0.38,15.63 0.65,15.9 3.98,15.9
N16452110 on ART03 (solid shape): 4.92,14.96 4.92,13.76 4.71,13.56 2.86,13.56 2.63,13.33 2.63,10.46 2.91,10.18 5.07,10.18 5.75,9.5 5.75,8.33 5.09,7.67 0.62,7.67 0.38,7.91 0.38,15.63 0.65,15.9 3.98,15.9
N16761444 on TOP (solid shape): 12.38,8.3 12.4,8.25 12.39,8.21 11.89,7.71 11.38,8.2 11.88,8.7

Small or netless copper shapes (teardrops, artwork), in the pictures only: 2 on TOP, 1 on BOTTOM

## Text on the board
User.Comments: 8 | 7 | 11 | 10 | 9 | 12 | 19 | 20 | 1 | 2 | 3 | 4 | 5 | 6 | 23 | 24 | ` | 0 | +0.10 | 13 | 14 | 15 | 16 | 17 | 18 | 21 | 22 | 25 | R3.00 | * | 0.10 | 23.20 | 25.90 | 17.85 | 4.50 | 8.35 | 33.00 | 0.08 | 3- | 3.10 | n | 1.00 | 0.15 | 5.50 | 2.68 | 0.16 | 1.60 | 42.00 | 3.50 | 0.075 | 26.00 | 1.50 | confidential | 14.35 | 21.20 | 34.50 | 34.90 | 35.00
Ref Des/Silkscreen Top: 3V3 | GND | XXX XXXX XX | PP001738.01 | CLK | AO2 | DATA | TIM | AO1
User.45: FIGURE | SIZE | 10.0 | 31.5 | 122.05 | 43.31x23.62 | DRILL CHART: TOP to BOTTOM | ALL UNITS ARE IN MILS | TOLERANCE | +3.0/-3.0 | +0.0/-0.0 | PLATED | QTY | 146 | 4 | 2 | 3
